# Altium PCB ifly watch_v1.PcbDoc
Units mm, origin at the board's own origin, x right, y up, seen from the top; angles counter-clockwise.
Board outline 44 x 25 mm, 2 copper layers (Top Layer, Bottom Layer); 60 components, 44 nets, 234 pads, 36 vias.
Unrouted connection lines stored in the file: 57.
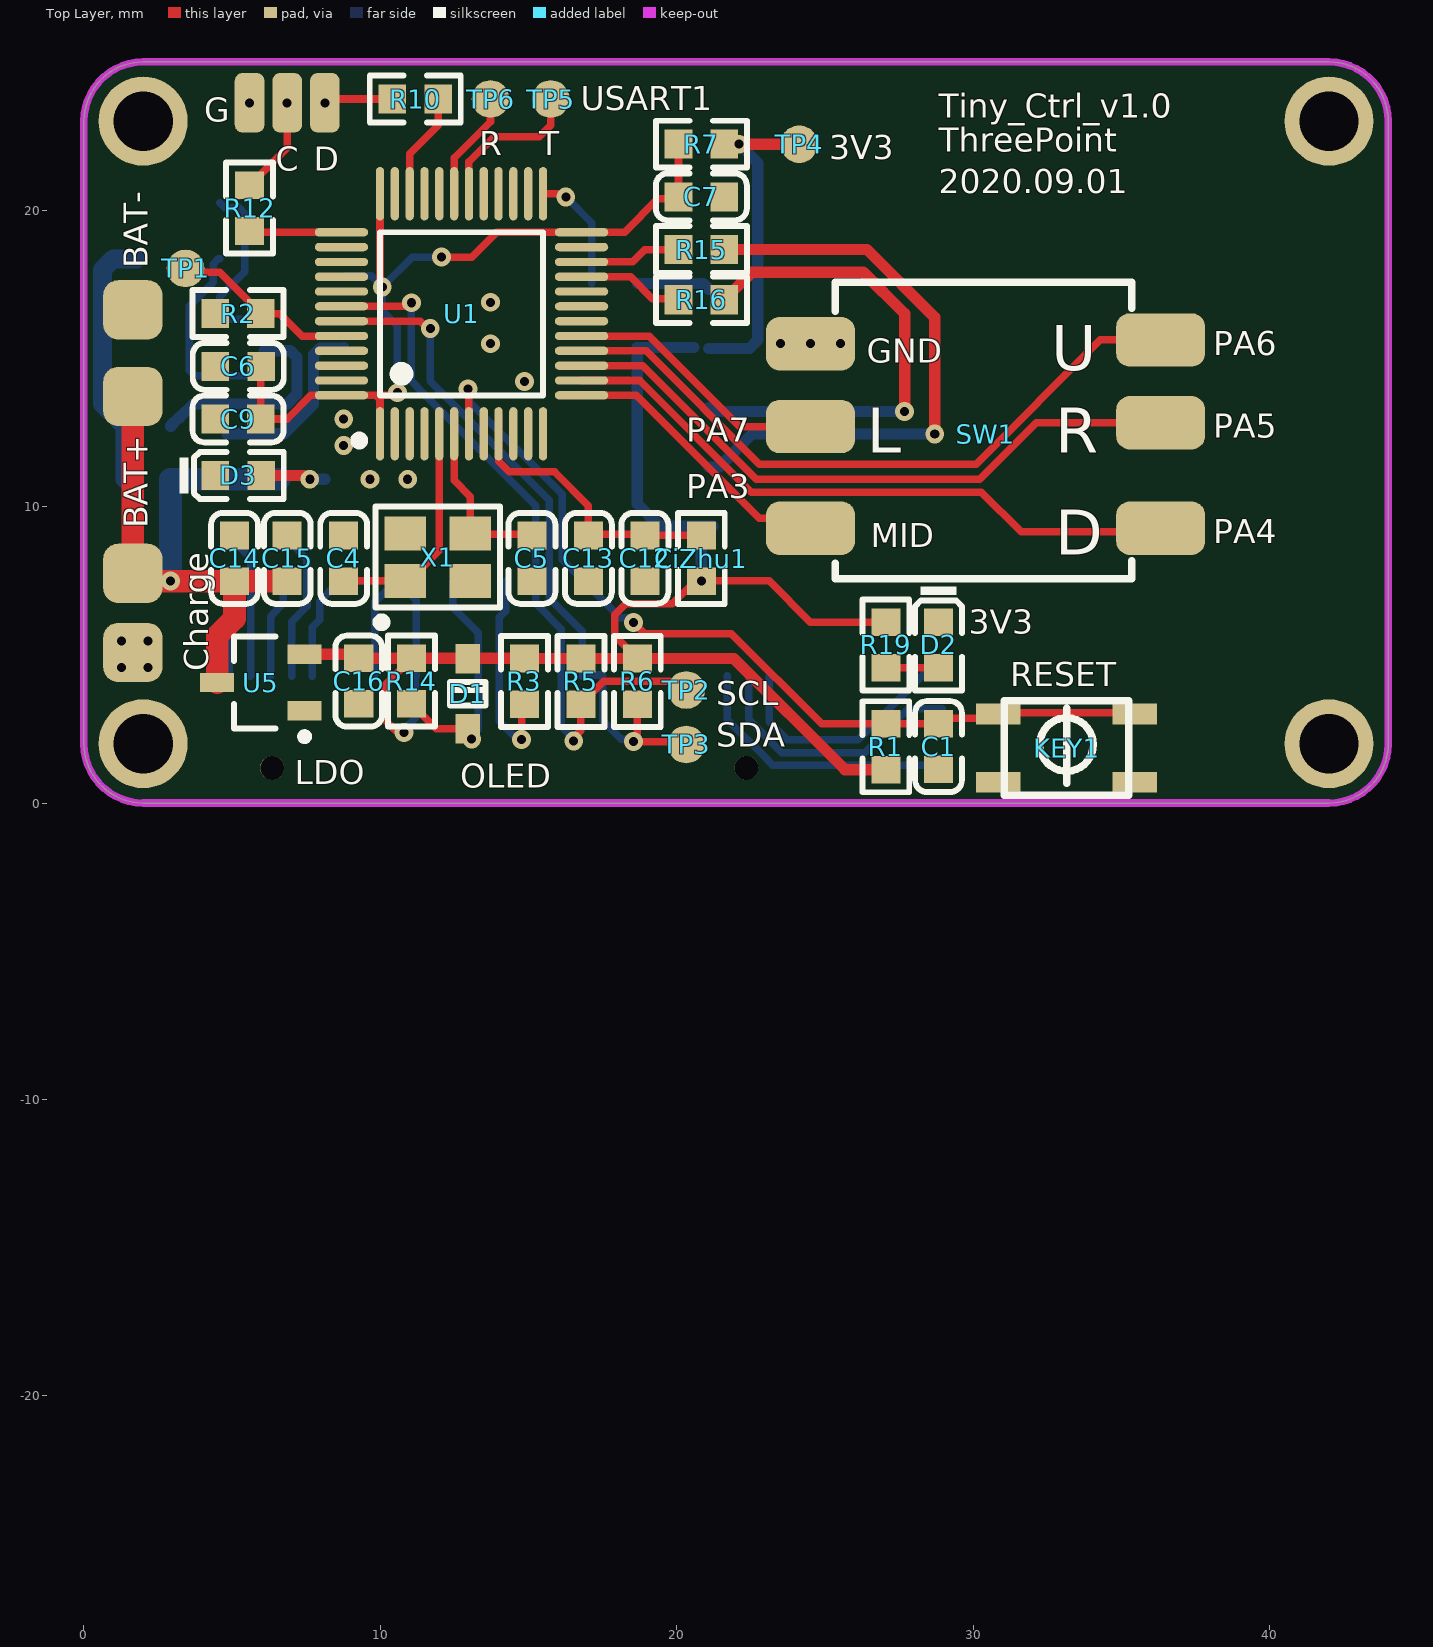
[diagram p0: Top Layer view]
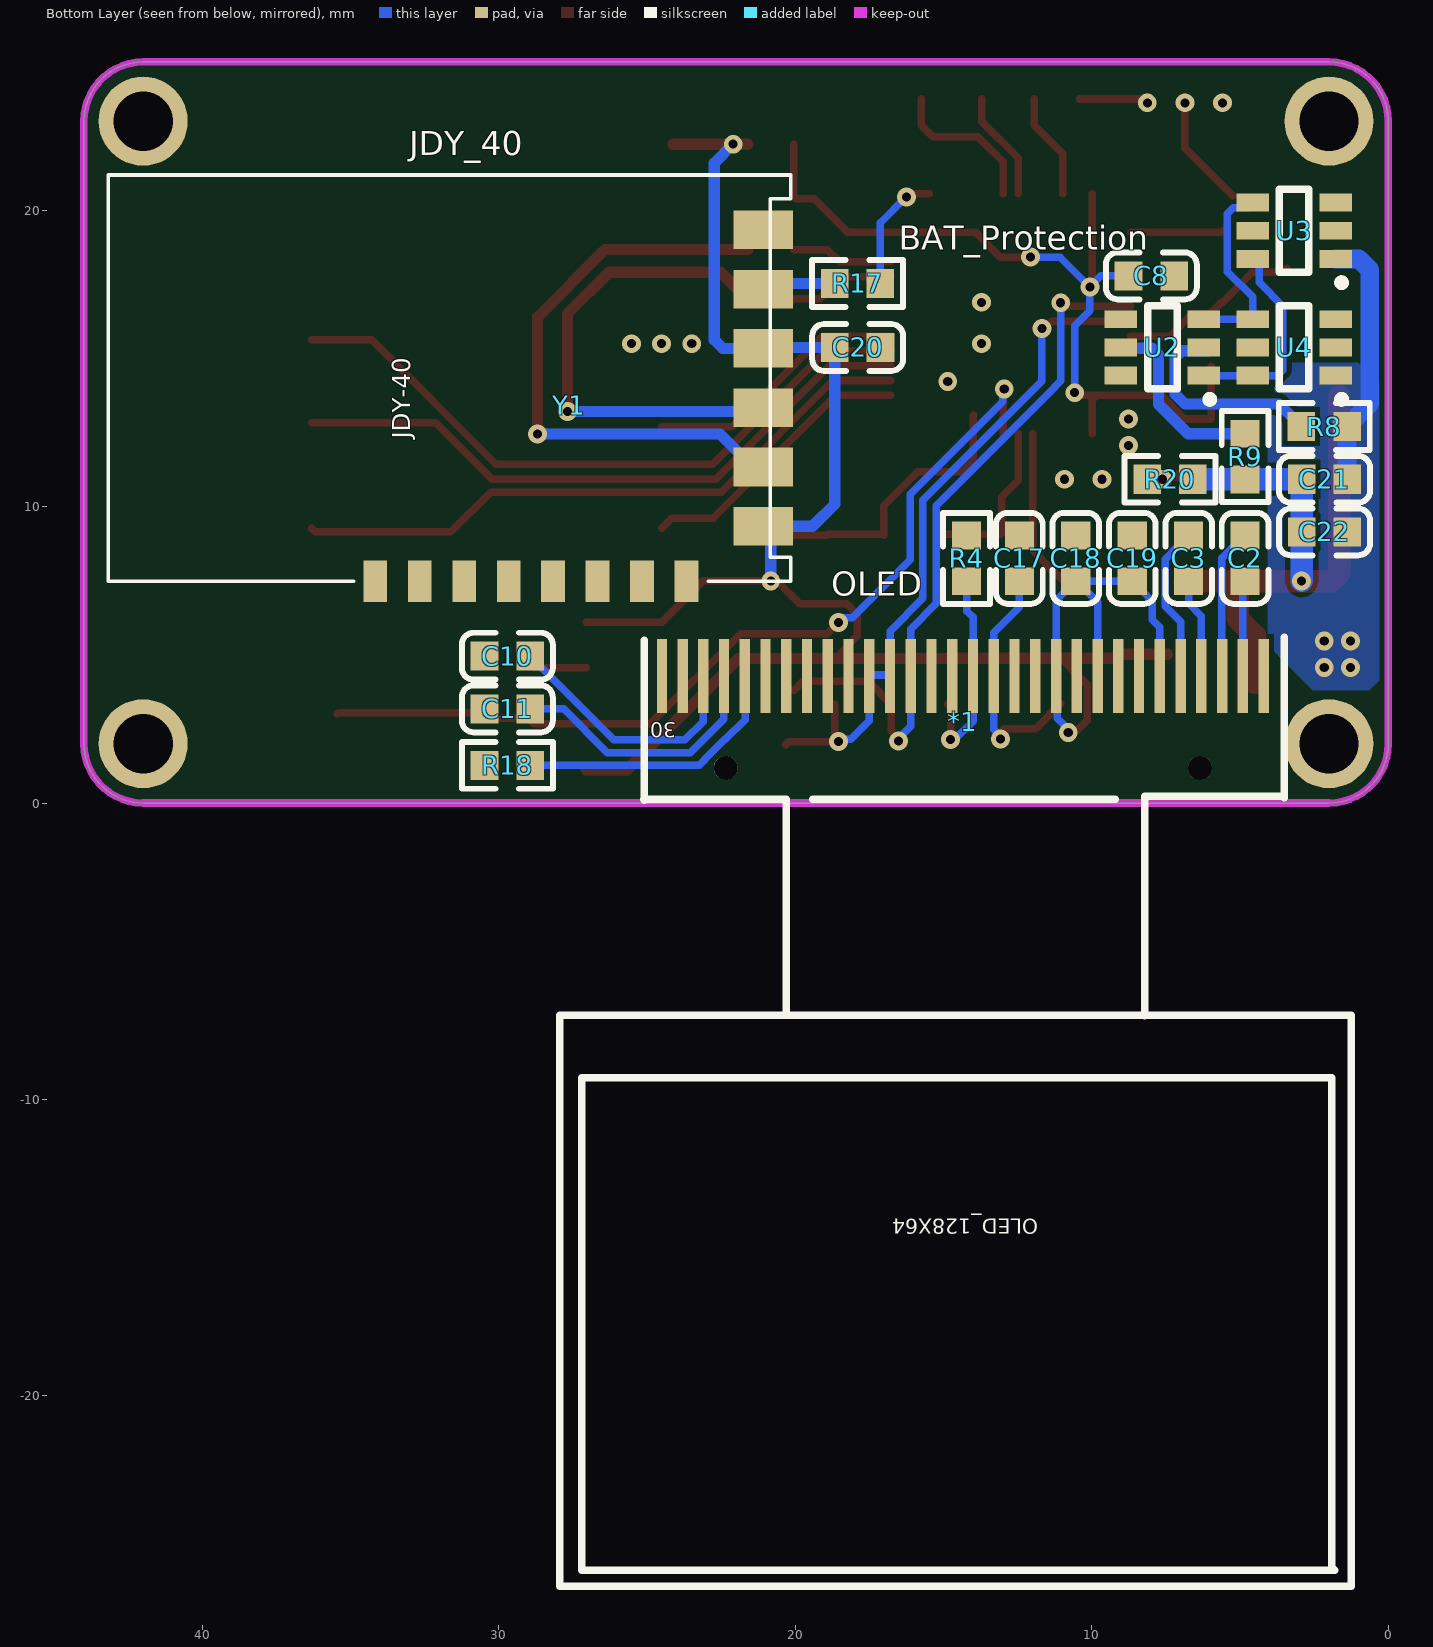
[diagram p1: Bottom Layer view, seen from below]
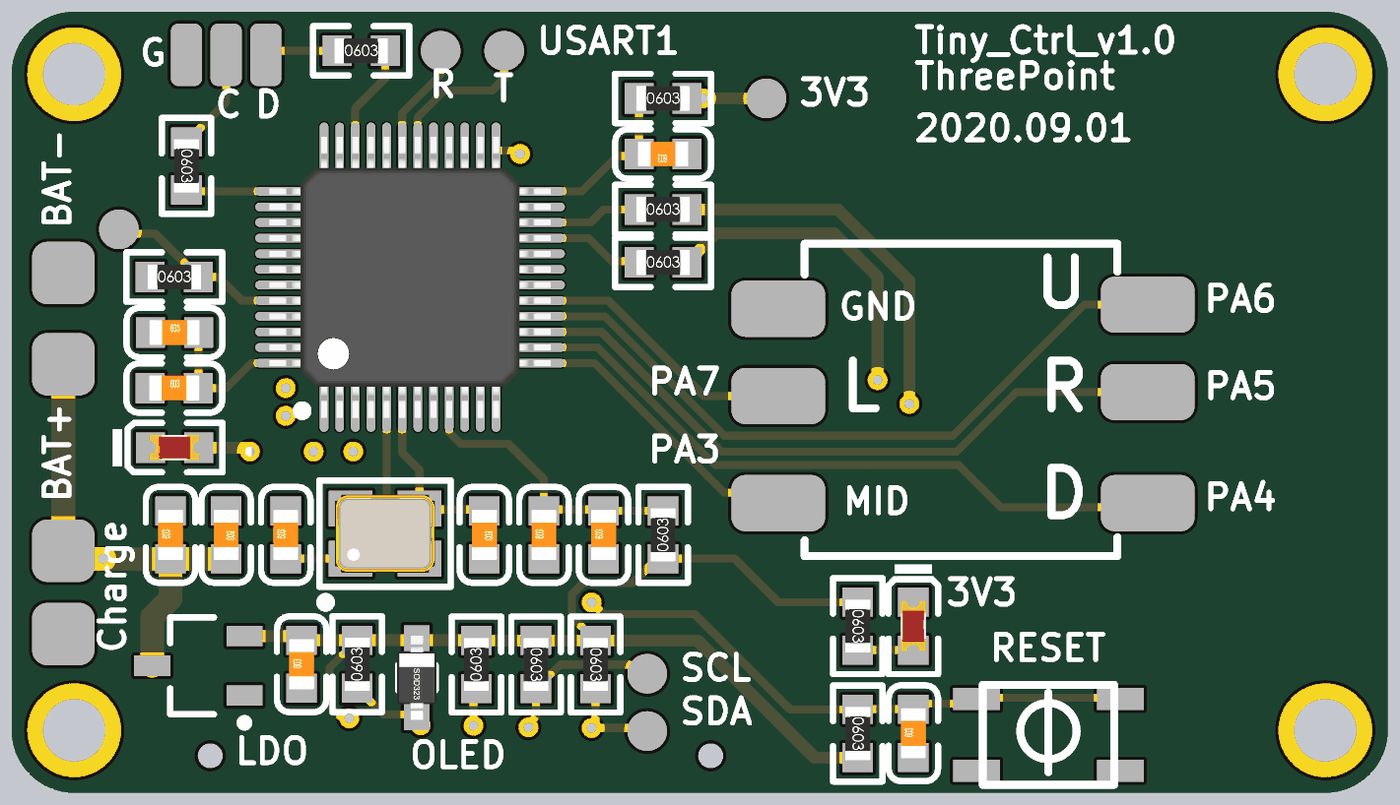
[diagram p2: 3D render of the assembled board from above, using the file's embedded part models]
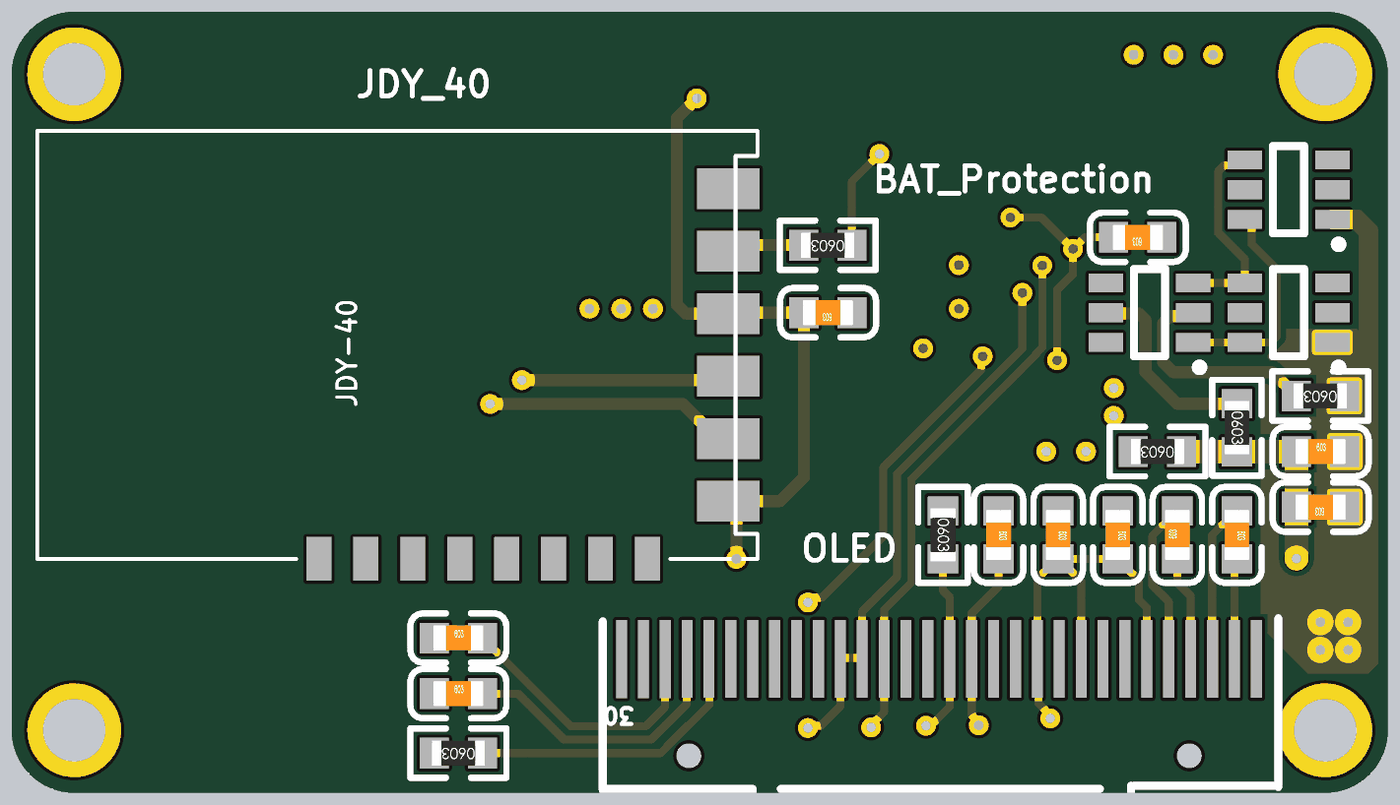
[diagram p3: 3D render of the assembled board from below, using the file's embedded part models]

## Layer stack, top to bottom
Top Solder: solder mask 0.0102, Solder Resist, Dk 3.5
Top Layer: signal copper 0.0356
Dielectric 1: dielectric 0.32, FR-4, Dk 4.8
Bottom Layer: signal copper 0.0356
Bottom Solder: solder mask 0.0102, Solder Resist, Dk 3.5

## Board outline
0,2 0,23 cw(c2,23) 2,25 42,25 cw(c42,23) 44,23 44,2 cw(c42,2) 42,0 2,0 cw(c2,2)

## Design rules (kind name [scope] priority, off if disabled: settings)
Clearance [All] p1: gap=0.178 ignorepadtopadclearanceinfootprint=TRUE
PlaneConnect [All] p1: planeconnectstyle=Direct reliefexpansion=0.508 reliefentries=4 reliefconductorwidth=0.254 reliefairgap=0.254
PolygonConnect [All] p1: connectstyle=Direct reliefconductorwidth=0.254 reliefentries=4 polygonreliefangle="90 Angle" airgapwidth=0.254
RoutingVias [All] p1: holewidth=0.305 width=0.635 viastyle="Through Hole" minholewidth=0.305 minwidth=0.508 maxholewidth=2.54 maxwidth=2.54
SolderMaskExpansion [All] p1: expansion=0.102
Width [All] p1: maxlimit=1.27 minlimit=0.254 preferedwidth=0.254
29 further rules are at their usual default settings.

## Components (designator, comment, footprint, x,y, rotation, side; value= is the part's Value field where it differs from the comment)
*1 "OLED_30Pin" OLED_0.96-30P-P0.70-12864 14.35,4.284 r0 bottom
C1 "100nF/0603/50V" LC-0603_C 28.829,1.905 r90 top
C2 "1uF/0603/50V" LC-0603_C 4.826,8.255 r270 bottom
C3 "1uF/0603/50V" LC-0603_C 6.731,8.255 r90 bottom
C4 "22pF/0603/50V" LC-0603_C 8.763,8.255 r90 top
C5 "22pF/0603/50V" LC-0603_C 15.113,8.255 r270 top
C6 "100nF/0603/50V" LC-0603_C 5.207,14.732 r0 top
C7 "100nF/0603/50V" LC-0603_C 20.828,20.447 r180 top
C8 "100nF/0603/50V" LC-0603_C 7.993,17.78 r0 bottom
C9 "100nF/0603/50V" LC-0603_C 5.199,12.954 r0 top
C10 "2.2uF/0603/16V" LC-0603_C 29.718,4.953 r180 bottom
C11 "4.7uF/0603/16V" LC-0603_C 29.718,3.175 r180 bottom
C12 "100nF/0603/50V" LC-0603_C 18.923,8.255 r90 top
C13 "1uF/0603/50V" LC-0603_C 17.018,8.255 r90 top
C14 "100nF/0603/50V" LC-0603_C 5.08,8.255 r90 top
C15 "1uF/0603/50V" LC-0603_C 6.858,8.255 r270 top
C16 "1uF/0603/50V" LC-0603_C 9.271,4.113 r90 top
C17 "10uF/0603/10V" LC-0603_C 12.446,8.255 r270 bottom
C18 "1uF/0603/50V" LC-0603_C 10.541,8.255 r270 bottom
C19 "1uF/0603/50V" LC-0603_C 8.636,8.255 r270 bottom
C20 "100nF/0603/50V" LC-0603_C 17.899,15.367 r0 bottom
C21 "100nF/0603/50V" LC-0603_C 2.151,10.922 r180 bottom
C22 "1uF/0603/50V" LC-0603_C 2.151,9.144 r0 bottom
CiZhu1 "600R/0603/5%" 0603_R 20.828,8.255 r90 top value=?
D1 "1N4148WS T4" LC-SOD-323 12.954,3.683 r270 top
D2 "红灯 0603" LC-0603_LED_S1 28.829,5.334 r270 top
D3 "红灯 0603" LC-0603_LED_S1 5.207,11.049 r0 top
KEY1 "KEY" SW_SMD_4P 33.147,1.905 r0 top
R1 "10KΩ/0603/1%" LC-0603_R 27.051,1.897 r270 top
R2 "10KΩ/0603/1%" LC-0603_R 5.199,16.51 r0 top
R3 "4.7KΩ/0603/1%" LC-0603_R 14.859,4.105 r90 top
R4 "4.7KΩ/0603/1%" LC-0603_R 14.224,8.255 r270 bottom
R5 "4.7KΩ/0603/1%" LC-0603_R 16.764,4.105 r270 top
R6 "4.7KΩ/0603/1%" LC-0603_R 18.669,4.105 r270 top
R7 "0Ω/0603/1%" LC-0603_R 20.828,22.225 r0 top
R8 "1KΩ/0603/1%" LC-0603_R 2.159,12.7 r0 bottom
R9 "100Ω/0603/1%" LC-0603_R 4.826,11.684 r270 bottom
R10 "100Ω/0603/1%" LC-0603_R 11.176,23.749 r0 top
R12 "100Ω/0603/1%" LC-0603_R 5.588,20.066 r270 top
R14 "4.7KΩ/0603/1%" LC-0603_R 11.049,4.113 r90 top
R15 "100Ω/0603/1%" LC-0603_R 20.828,18.669 r0 top
R16 "100Ω/0603/1%" LC-0603_R 20.828,16.977 r0 top
R17 "100Ω/0603/1%" LC-0603_R 17.907,17.526 r0 bottom
R18 "1MΩ/0603/1%" LC-0603_R 29.718,1.27 r0 bottom
R19 "1KΩ/0603/1%" LC-0603_R 27.051,5.334 r270 top
R20 "1KΩ/0603/1%" LC-0603_R 7.366,10.922 r0 bottom
SW1 "5P_Switch" 5Position_Switch 30.353,12.573 r270 top
TP1 "TestPoint" TestPoint 3.429,18.034 r90 top
TP2 "TestPoint" TestPoint 20.32,3.81 r90 top
TP3 "TestPoint" TestPoint 20.32,1.974 r90 top
TP4 "TestPoint" TestPoint 24.13,22.225 r90 top
TP5 "TestPoint" TestPoint 15.748,23.749 r90 top
TP6 "TestPoint" TestPoint 13.716,23.749 r90 top
U1 "STM32F103C8T6" LQFP-48_7x7x05P 12.738,16.503 r0 top
U2 "DW01KA" SOT-23-6 7.62,15.367 r180 bottom
U3 "SC8205C" SOT-23-6 3.175,19.304 r180 bottom
U4 "SC8205C" SOT-23-6 3.175,15.367 r180 bottom
U5 "SC662K-3.3V" SOT-23-3L 5.969,4.064 r0 top
X1 "无源贴片晶振" SMD-3225_4P 11.938,8.296 r0 top
Y1 "JDY-40_1" "JDY-401 -No via" 34.174,7.485 r90 bottom

## Footprints (in the part's own frame and the unit in brackets; to place one, negate y for a bottom-side part, rotate by r counter-clockwise, add the part's x,y. Pads: shape width x height; smd on the part's side, far side on the other; paste and mask are expansions set on the pad)
5Position_Switch [mm]
  rrect50% 1.8x3 smd: 1(-2.921,-5.842) 2(-0.127,-5.842) 3(3.302,-5.842) 4(3.302,5.969) 5(-0.254,5.969) 6(-3.048,5.969)
  silkscreen extent -5,-5 5,5
0603_R [mm]
  rect 0.93x0.98 smd: 1(-0.77,0) 2(0.77,0)
  silkscreen extent -1.53,-0.79 1.54,0.79, body extent -0.85,-0.4 0.85,0.4, height 0.56
"JDY-401 -No via" [mm] "串口透传"
  rect 1.4x0.8 smd: 1(0,0) 2(0,-1.5) 3(0,-3) 4(0,-4.5) 5(0,-6) 6(0,-7.5) 7(0,-9) 8(0,-10.5)
  rect 1.3x2 smd: 9(1.85,-13.092) 10(3.85,-13.092) 11(5.85,-13.092) 12(7.85,-13.092) 13(9.85,-13.092) 14(11.85,-13.092)
  silkscreen extent 0,-14.02 13.7,9.01
LC-0603_C [mm]
  rect 0.93x0.98 smd: 1(-0.77,0) 2(0.77,0)
  silkscreen extent -1.53,-0.79 1.54,0.79, body extent -0.8,-0.4 0.8,0.4, height 0.3
LC-0603_LED_S1 [mm]
  rect 0.93x0.98 smd: A(0.77,0) K(-0.77,0)
  silkscreen extent -1.98,-0.79 1.54,0.79, body extent -0.8,-0.4 0.8,0.4, height 0.6
LC-0603_R [mm]
  rect 0.93x0.98 smd: 1(-0.77,0) 2(0.77,0)
  silkscreen extent -1.53,-0.79 1.54,0.79, body extent -0.85,-0.4 0.85,0.4, height 0.56
LC-SOD-323 [mm]
  rect 1x0.83 smd: 1(1.18,0) 2(-1.18,0)
  silkscreen extent -0.4,-0.6 0.4,0.6, body extent -1.35,-0.62 1.35,0.63, height 1.1
LQFP-48_7x7x05P [mm]
  oval 0.28x1.8 smd mask+0.051: 1(-2.75,-4.05) 2(-2.25,-4.05) 3(-1.75,-4.05) 4(-1.25,-4.05) 5(-0.75,-4.05) 6(-0.25,-4.05) 7(0.25,-4.05) 8(0.75,-4.05) 9(1.25,-4.05) 10(1.75,-4.05) 11(2.25,-4.05) 12(2.75,-4.05) 25(2.75,4.05) 26(2.25,4.05) 27(1.75,4.05) 28(1.25,4.05) 29(0.75,4.05) 30(0.25,4.05) 31(-0.25,4.05) 32(-0.75,4.05) 33(-1.25,4.05) 34(-1.75,4.05) 35(-2.25,4.05) 36(-2.75,4.05)
  oval 1.8x0.28 smd mask+0.051: 13(4.05,-2.75) 14(4.05,-2.25) 15(4.05,-1.75) 16(4.05,-1.25) 17(4.05,-0.75) 18(4.05,-0.25) 19(4.05,0.25) 20(4.05,0.75) 21(4.05,1.25) 22(4.05,1.75) 23(4.05,2.25) 24(4.05,2.75) 37(-4.05,2.75) 38(-4.05,2.25) 39(-4.05,1.75) 40(-4.05,1.25) 41(-4.05,0.75) 42(-4.05,0.25) 43(-4.05,-0.25) 44(-4.05,-0.75) 45(-4.05,-1.25) 46(-4.05,-1.75) 47(-4.05,-2.25) 48(-4.05,-2.75)
  silkscreen extent -3.6,-4.42 2.75,2.75, body extent -4.5,-4.5 4.5,4.5, height 1.6
OLED_0.96-30P-P0.70-12864 [mm]
  rect 0.351x2.499 smd: 1(-10.149,-0.002) 2(-9.444,0) 3(-8.744,0) 4(-8.044,0) 5(-7.344,0) 6(-6.644,0) 7(-5.944,0) 8(-5.244,0) 9(-4.544,0) 10(-3.844,0) 11(-3.144,0) 12(-2.444,0) 13(-1.744,0) 14(-1.044,0) 15(-0.344,0) 16(0.356,0) 17(1.056,0) 18(1.756,0) 19(2.456,0) 20(3.156,0) 21(3.856,0) 22(4.556,0) 23(5.256,0) 24(5.956,0) 25(6.656,0) 26(7.356,0) 27(8.056,0) 28(8.751,0.001) 29(9.45,0.002) 30(10.149,0.002)
  round 0.8 hole 0.8 unplated: ""(-8,3.1) ""(8,3.1)
  silkscreen extent -13.1,-1.3 13.6,30.7
SMD-3225_4P [mm] "晶振"
  rect 1.4x1.15 smd: 1(-1.1,-0.8) 2(1.1,-0.8) 3(1.1,0.8) 4(-1.1,0.8)
  silkscreen extent -2.1,-2.35 2.1,1.7, body extent -1.6,-1.25 1.6,1.25, height 0.61
SOT-23-3L [mm] "http://www.aosmd.com/res/packaging_information/SOT-23-3L.pdf"
  rect 1.15x0.65 smd: 1(1.475,-0.95) 2(1.475,0.95) 3(-1.475,0)
  silkscreen extent -0.9,-1.95 1.6,1.55, body extent -0.9,-1.55 0.9,1.55, height 1.25
SOT-23-6 [mm]
  rect 1.1x0.6 smd: 1(1.4,-0.95) 2(1.4,0) 3(1.4,0.95) 4(-1.4,0.95) 5(-1.4,0) 6(-1.4,-0.95)
  silkscreen extent -0.5,-1.87 1.72,1.4
SW_SMD_4P [mm]
  rect 1.5x0.7 smd: 1(2.301,-1.201) 2(-2.298,-1.201) 3(2.301,1.099) 4(-2.298,1.099)
  silkscreen extent -2.1,-1.65 2.1,1.55
TestPoint [mm]
  round 1.27 smd: 1(0,0)

## Part data
C1 C6 C7 C8 C9 C12 C14 C20 C21: library part "0603 100nF (104) 10% 50V", "贴片电容", Package=0603, SuppliersPartNumber=C14663, ComponentLink1Description=供应商链接, ComponentLink1URL=http://www.szlcsc.com/product/details_15331.html, Supplier=LC
C2 C3 C13 C15 C16 C18 C19 C22: library part "0603 1uF (105) 10% 50V", "贴片电容", Package=0603, SuppliersPartNumber=C15849, ComponentLink1Description=供应商链接, ComponentLink1URL=http://www.szlcsc.com/product/details_16531.html, Supplier=LC
C4 C5: library part "0603 22pF (220) 5% 50V", "贴片电容", Package=0603, SuppliersPartNumber=C1653, ComponentLink1Description=供应商链接, ComponentLink1URL=http://www.szlcsc.com/product/details_2005.html, Supplier=LC
C10: library part "0603 2.2uF (225) 10% 16V", "贴片电容", Package=0603, SuppliersPartNumber=C23630, ComponentLink1Description=供应商链接, ComponentLink1URL=http://www.szlcsc.com/product/details_24366.html, Supplier=LC
C11: library part "0603 4.7uF (475) 10% 16V", "贴片电容", Package=0603, SuppliersPartNumber=C19666, ComponentLink1Description=供应商链接, ComponentLink1URL=http://www.szlcsc.com/product/details_20375.html, Supplier=LC
C17: library part "0603 10uF (106) 10% 10V", "贴片电容", Package=0603, SuppliersPartNumber=C19702, ComponentLink1Description=供应商链接, ComponentLink1URL=http://www.szlcsc.com/product/details_20411.html, Supplier=LC
CiZhu1: library part Cizhu, "电阻_磁珠"
D1: library part "SOD-323 1N4148WS T4", "二极管", Package=SOD-323, SuppliersPartNumber=C2128, ComponentLink1Description=供应商链接, ComponentLink1URL=http://www.szlcsc.com/product/details_2485.html, Supplier=LC
D2 D3: library part "0603 红灯", "发光二极管", Package=0603, SuppliersPartNumber=C2286, ComponentLink1Description=供应商链接, ComponentLink1URL=http://www.szlcsc.com/product/details_2659.html, Supplier=LC
KEY1: library part KEY_1, "开关"
R1 R2: library part "0603 10KΩ (1002) 1%", "贴片电阻", Package=0603, SuppliersPartNumber=C25804, ComponentLink1Description=供应商链接, ComponentLink1URL=http://www.szlcsc.com/product/details_26547.html, Supplier=LC
R3 R4 R5 R6 R14: library part "0603 4.7KΩ (4701) 1%", "贴片电阻", Package=0603, SuppliersPartNumber=C23162, ComponentLink1Description=供应商链接, ComponentLink1URL=http://www.szlcsc.com/product/details_23889.html, Supplier=LC
R7: library part "0603 0Ω (0R0) 1%", "贴片电阻", Package=0603, SuppliersPartNumber=C21189, ComponentLink1Description=供应商链接, ComponentLink1URL=http://www.szlcsc.com/product/details_21903.html, Supplier=LC
R8 R19 R20: library part "0603 1KΩ (1001) 1%", "贴片电阻", Package=0603, SuppliersPartNumber=C21190, ComponentLink1Description=供应商链接, ComponentLink1URL=http://www.szlcsc.com/product/details_21904.html, Supplier=LC
R9 R10 R12 R15 R16 R17: library part "0603 100Ω (1000) 1%", "贴片电阻", Package=0603, SuppliersPartNumber=C22775, ComponentLink1Description=供应商链接, ComponentLink1URL=http://www.szlcsc.com/product/details_23502.html, Supplier=LC
R18: library part "0603 1MΩ (1004) 1%", "贴片电阻", Package=0603, SuppliersPartNumber=C22935, ComponentLink1Description=供应商链接, ComponentLink1URL=http://www.szlcsc.com/product/details_23662.html, Supplier=LC
SW1: "5向开关"
U1: "ARM", Package=LQFP-48_7x7x05P, SuppliersPartNumber=C8734, ComponentLink1Description=供应商链接, ComponentLink1URL=http://www.szlcsc.com/product/details_9243.html, Supplier=LC
U2: "锂电池保护芯片"
U3 U4: "二合一MOS"
U5: "LDO"
X1: library part XTAL_4, "25M/3225"
Y1: "串口透传无过孔"

## Free pads (board coordinates)
  rrect50% 2x2 smd: 1(1.651,7.747) 1(1.651,13.716) 2(1.651,5.08) 2(1.651,16.637)
  round 3 hole 2: 3(2,2) 3(2,23) 3(42,2) 3(42,23)
  rrect50% 1x2 smd: 4(5.588,23.622) 5(6.858,23.622) 6(8.128,23.622)

## Via types
v1: diameter 0.635, hole 0.305, Top Layer to Bottom Layer, 36 vias

## Nets (pads, with @x,y where several pads share a name; then routed paths per layer and width w, separated by ;. In a path a pad name is that pad's centre, name@x,y a point inside that pad or via, vN(x,y) a via of type N, cw(c..) or ccw(c..) an arc to the next point about the centre after c; other vN are vias at no path point)
3V3: *1.6 *1.9 *1.11 C16.2 C18.2 C19.2 C20.2 CiZhu1.1 D1.2 R1.2 R3.2 R5.1 R6.1 R7.2 R14.2 R19.1 TP4.1 U5.2 Y1.9 Y1.12 | length 73.8
  Top Layer w0.254: v1(10.795,2.383) 10.722,2.455 10.499,2.455 10.16,2.794 10.16,3.994 10.686,4.52 10.686,4.545 R14.2@11.024,4.883 ; R6.1 18.644,4.875 18.306,5.213 18.306,5.238 17.907,5.637 17.907,6.35 18.272,6.715 19.849,6.715 20.619,7.485 v1(20.828,7.485) 20.836,7.493 23.114,7.493 24.503,6.104 R19.1
  Top Layer w0.381: U5.2 9.14,5.014 C16.2 11.024,4.883 R3.2@14.859,4.883 ; R3.2 R5.1 R6.1@18.644,4.875 ; R6.1 21.922,4.875 25.67,1.127 R1.2 ; R7.2 v1(22.098,22.225) TP4.1
  Bottom Layer w0.254: *1.6 7.706,5.928 7.958,6.18 7.958,6.807 8.273,7.122 8.273,7.147 8.611,7.485 C19.2 ; C19.2@8.947,7.415 9.017,7.485 C18.2@10.516,7.485 ; *1.9 9.806,6.775 C18.2@10.516,7.485 ; v1(10.795,2.383) 10.795,2.486 11.172,2.863 *1.11@11.172,4.202 ; *1.11 11.206,6.845 10.566,7.485 C18.2@10.516,7.485
  Bottom Layer w0.381: Y1.12@20.574,15.367 C20.2 18.669,10.089 19.423,9.335 Y1.9 21.209,9.335 20.828,8.954 v1(20.828,7.485) ; Y1.12 22.447,15.335 22.733,15.621 22.733,21.59 v1(22.098,22.225)
BAT+: C14.1 C15.2 C21.1 C22.2 pad.1 R9.2 R20.1 U5.3 | length 21.9
  Top Layer w0.762: pad.1@1.651,13.716 1.651,7.747 1.913,7.485 C14.1 ; U5.3 4.494,5.637 5.08,6.223 C14.1 ; C15.2 C14.1
  Bottom Layer w0.762: v1(2.921,7.493) C22.2 C21.1 R9.2@4.691,10.922 ; R9.2 4.834,10.922 R20.1
BOOT0: R2.2 TP1.1 U1.44 | length 6.2
  Top Layer w0.254: TP1.1 3.563,17.9 4.579,17.9 5.606,16.873 5.631,16.873 5.969,16.535 R2.2 6.604,16.51 7.361,15.753 U1.44
CS: R17.1 U1.25 | length 4.1
  Top Layer w0.254: U1.25 16.047,20.553 16.153,20.447 v1(16.256,20.447)
  Bottom Layer w0.254: v1(16.256,20.447) 17.137,19.566 R17.1
GND: *1.1 *1.8 *1.10 *1.12 *1.13 *1.16 *1.17 *1.21 *1.22 *1.23 *1.24 *1.25 *1.29 *1.30 C1.1 C4.2 C5.2 C6.1 C7.1 C8.1 C9.1 C10.1 C11.1 C12.1 C13.1 C14.2 C15.1 C16.1 C17.1 C18.1 C19.1 C20.1 D2.K D3.K KEY1.1 KEY1.2 pad.2@1.651,16.637 pad.4 R2.1 R4.1 R18.2 SW1.1 U1.8 U1.23 U1.35 U1.47 U2.6 U3.3 U4.3 U5.1 Y1.14
  other v1: 9.652,10.922 10.922,10.922 8.763,12.065 8.763,12.954 14.859,14.224 13.716,15.494 23.495,15.494 24.511,15.494 25.527,15.494 13.716,16.891 5.588,23.622
Net*1_2: *1.2 C2.2 | length 3.2
  Bottom Layer w0.254: C2.2 4.906,7.405 *1.2
Net*1_3: *1.3 C2.1 | length 5.2
  Bottom Layer w0.254: C2.1@4.724,9.152 5.621,8.255 5.621,4.299 *1.3
Net*1_4: *1.4 C3.1 | length 3.4
  Bottom Layer w0.254: *1.4 6.306,6.306 6.731,6.731 C3.1
Net*1_5: *1.5 C3.2 | length 5.3
  Bottom Layer w0.254: C3.2 6.756,9.025 7.094,8.687 7.094,8.662 7.526,8.23 7.526,6.637 7.006,6.117 *1.5
Net*1_15: *1.15 R3.1 R4.2 | length 7.1
  Top Layer w0.254: v1(14.766,2.146) 14.766,3.242 R3.1
  Bottom Layer w0.254: R4.2 14.224,6.477 14.006,6.259 14.006,2.758 14.618,2.146 v1(14.766,2.146)
Net*1_26: *1.26 R18.1 | length 9.4
  Bottom Layer w0.254: *1.26 21.694,4.272 21.694,2.817 22.365,2.146 22.384,2.146 23.055,1.476 23.055,1.456 23.241,1.27 R18.1
Net*1_27: *1.27 C11.2 | length 9.1
  Bottom Layer w0.254: *1.27 22.423,4.268 22.423,2.826 23.547,1.702 26.34,1.702 27.813,3.175 C11.2
Net*1_28: *1.28 C10.2 | length 8.8
  Bottom Layer w0.254: *1.28@23.114,4.282 23.114,2.745 23.726,2.134 26.129,2.134 28.585,4.59 28.61,4.59 28.948,4.928 C10.2
NetC4_1: C4.1 U1.5 X1.1 | length 7.6
  Top Layer w0.254: C4.1 8.774,7.496 10.963,7.496 11.411,7.944 11.988,8.521 U1.5
NetC5_1: C5.1 U1.6 X1.3 | length 5.6
  Top Layer w0.254: U1.6 12.488,10.88 13.038,10.33 X1.3@13.038,9.185 ; X1.3 13.068,9.066 15.072,9.066 C5.1
NetD2_A: D2.A R19.2 | length 1.8
  Top Layer w0.254: R19.2 D2.A
NetD3_A: D3.A R20.2 | length 2.2
  Top Layer w0.381: D3.A 7.424,11.049 7.551,10.922 v1(7.62,10.922)
  Bottom Layer w0.381: v1(7.62,10.922) R20.2
NetJ1_1: pad.6 R10.1 | length 2.3
  Top Layer w0.254: v1(8.128,23.622) 8.255,23.749 R10.1
NetJ1_2: pad.5 R12.1 | length 4
  Top Layer w0.254: R12.1@5.244,20.492 6.858,22.106 pad.5@6.858,23.806
  other v1: 6.858,23.622
NetR8_2: R8.2 U2.2 | length 7.2
  Bottom Layer w0.381: R8.2 2.929,12.725 3.204,13 3.229,13 3.691,13.462 6.858,13.462 7.188,13.792 7.188,15.034 6.965,15.258 U2.2@6.075,15.258
NetR9_1: R9.1 U2.5 | length 6.1
  Bottom Layer w0.381: R9.1 6.747,12.454 7.747,13.454 7.747,15.12 7.97,15.343 8.742,15.343 U2.5@8.766,15.367
NetR15_2: R15.2 Y1.10 | length 20.1
  Top Layer w0.381: R15.2 26.416,18.669 28.702,16.383 v1(28.702,12.446)
  Bottom Layer w0.381: Y1.10 21.432,11.335 22.543,12.446 v1(28.702,12.446)
NetR16_2: R16.2 Y1.11 | length 17
  Top Layer w0.381: R16.2 21.598,17.002 21.873,17.277 21.898,17.277 22.528,17.907 26.289,17.907 27.686,16.51 v1(27.686,13.208)
  Bottom Layer w0.381: Y1.11 21.209,13.208 v1(27.686,13.208)
NetR17_2: R17.2 Y1.13 | length 2.5
  Bottom Layer w0.381: R17.2 20.891,17.526 Y1.13
OC: U2.3 U3.4 U4.4 | length 6.6
  Bottom Layer w0.254: U3.4 4.748,20.081 5.235,20.081 5.43,19.886 5.43,17.928 4.575,17.073 U4.4 5.97,16.317 U2.3
OD: U2.1 U3.6 U4.6 | length 6.7
  Bottom Layer w0.254: U4.6@4.321,14.417 3.744,14.417 3.556,14.605 3.556,16.764 4.356,17.564 4.356,18.181 4.529,18.354 U3.6 ; U4.6 U2.1
PA3: SW1.3 U1.13 | length 9.6
  Top Layer w0.254: U1.13 16.793,13.748 18.637,13.748 22.779,9.606 24.176,9.606 SW1.3
PA4: SW1.4 U1.14 | length 21.7
  Top Layer w0.254: U1.14 18.743,14.253 22.505,10.49 30.277,10.49 31.623,9.144 36.195,9.144 SW1.4
PA5: SW1.5 U1.15 | length 21.9
  Top Layer w0.254: U1.15 18.853,14.753 22.684,10.922 30.226,10.922 32.131,12.827 SW1.5
PA6: SW1.6 U1.16 | length 22.9
  Top Layer w0.254: U1.16 18.964,15.253 22.787,11.43 30.099,11.43 34.29,15.621 SW1.6
PA7: SW1.2 U1.17 | length 9
  Top Layer w0.254: U1.17 19.075,15.753 22.128,12.7 SW1.2
PGND: C21.2 C22.1 pad.2@1.651,5.08 R8.1 U3.1 U4.1 | length 8.7
  Bottom Layer w0.635: C21.2 1.389,10.93 1.389,12.725 1.242,12.873 1.216,12.873 0.622,13.467 0.622,17.982 0.994,18.354 U3.1
  other v1: 1.27,4.572 2.159,4.572 1.27,5.461 2.159,5.461
RES#: *1.14 C17.2 D1.1 R14.1 | length 8.4
  Top Layer w0.254: R14.1 11.074,3.343 11.412,3.005 11.412,2.98 11.889,2.503 D1.1 13.081,2.376 v1(13.081,2.159)
  Bottom Layer w0.254: C17.2 12.446,6.604 13.306,5.744 *1.14 13.306,2.487 13.081,2.262 v1(13.081,2.159)
RESET: C1.2 KEY1.3 KEY1.4 R1.1 U1.7 | length 30.5
  Top Layer w0.254: v1(12.954,13.97) 12.988,13.936 U1.7 ; v1(18.542,6.093) 18.545,6.093 18.923,5.715 21.844,5.715 24.892,2.667 R1.1 27.059,2.675 C1.2 29.013,2.859 30.304,2.859 30.493,3.048 35.404,3.048 KEY1.3
  Bottom Layer w0.254: v1(12.954,13.97) 13.003,13.921 13.003,13.54 16.129,10.414 16.129,8.206 18.087,6.248 18.517,6.248 18.542,6.223 v1(18.542,6.093)
SCL: *1.18 R5.2 TP2.1 U1.42 | length 24.8
  Top Layer w0.254: U1.42 10.927,16.753 v1(11.049,16.875) ; v1(16.523,2.093) 16.523,2.196 16.764,2.438 R5.2 16.789,3.335 17.127,3.673 17.127,3.698 17.534,4.105 19.75,4.105 20.045,3.81 TP2.1
  Bottom Layer w0.254: v1(11.049,16.875) 11.049,14.25 11.252,14.047 11.252,14.021 15.24,10.033 15.24,6.731 16.106,5.865 16.106,2.583 16.523,2.166 v1(16.523,2.093)
SDA: *1.19 *1.20 R6.2 TP3.1 U1.43 | length 23.6
  Top Layer w0.254: U1.43 11.345,16.253 11.596,16.002 v1(11.684,16.002) ; R6.2 18.669,2.303 18.542,2.176 v1(18.542,2.073) 20.221,2.073 TP3.1
  Bottom Layer w0.254: v1(11.684,16.002) 11.684,14.224 15.697,10.211 15.697,6.909 16.806,5.8 *1.19@16.806,4.318 ; *1.19 16.84,4.318 17.472,4.318 *1.20 17.506,2.767 18.127,2.146 18.469,2.146 v1(18.542,2.073)
SWCLK: R12.2 U1.37 | length 3.1
  Top Layer w0.254: R12.2 5.631,19.253 U1.37
SWDIO: R10.2 U1.34 | length 3.6
  Top Layer w0.254: U1.34 10.988,21.91 11.946,22.868 R10.2
USART1_RX(PA10): TP6.1 U1.31 | length 3.7
  Top Layer w0.254: U1.31 12.488,21.759 13.716,22.987 TP6.1
USART1_TX(PA9): TP5.1 U1.30 | length 5.2
  Top Layer w0.254: U1.30 12.988,21.624 13.843,22.479 15.367,22.479 15.748,22.86 TP5.1
USART3_RX: R15.1 U1.22 | length 3.4
  Top Layer w0.254: U1.22 18.507,18.253 18.923,18.669 R15.1
USART3_TX: R16.1 U1.21 | length 3.6
  Top Layer w0.254: U1.21 18.442,17.753 19.177,17.018 20.017,17.018 R16.1
VDD: C6.2 C7.2 C8.2 C9.2 R7.1 U1.1 U1.24 U1.36 U1.48 | length 29.6
  Top Layer w0.254: C6.2 5.969,14.724 C9.2 6.858,12.954 7.657,13.753 U1.48 9.839,13.753 ; U1.1 9.988,13.604 9.839,13.753 ; U1.36 9.988,17.586 10.064,17.51 v1(10.064,17.407) ; v1(10.577,13.842) 10.474,13.842 10.385,13.753 9.839,13.753 ; v1(12.065,18.415) 13.081,18.415 13.919,19.253 U1.24 18.237,19.253 19.361,20.377 19.988,20.377 C7.2 R7.1
  Bottom Layer w0.254: C8.2 9.691,17.78 v1(10.064,17.407) ; v1(10.577,13.842) 10.577,16.093 10.064,16.606 v1(10.064,17.407) ; v1(12.065,18.415) 11.072,18.415 v1(10.064,17.407)
VDDA: C12.2 C13.2 CiZhu1.2 U1.9 | length 10.1
  Top Layer w0.254: U1.9@13.988,13.088 13.993,13.083 13.993,11.534 14.351,11.176 15.875,11.176 17.018,10.033 C13.2 17.059,9.066 18.882,9.066 C12.2 CiZhu1.2
pads on no net: *1. *1.7 U1.2 U1.3 U1.4 U1.10 U1.11 U1.12 U1.18 U1.19 U1.20 U1.26 U1.27 U1.28 U1.29 U1.32 U1.33 U1.38 U1.39 U1.40 U1.41 U1.45 U1.46 U2.4 U3.2 U3.5 U4.2 U4.5 X1.2 X1.4 Y1.1 Y1.2 Y1.3 Y1.4 Y1.5 Y1.6 Y1.7 Y1.8

## Polygon pours and split planes (outlines as drawn)
PGND on Bottom Layer "c" (solid, remove dead copper, pour order 0): 1.016,14.859 0.254,14.097 0.254,4.191 0.635,3.81 2.54,3.81 4.064,5.334 4.064,14.097 3.302,14.859

## Keep-outs
Keep-Out Layer:
  the board outline again, w0.254

## Silkscreen, mask and mechanical layers (free items; w line width, h text height)
Top Overlay:
  text "USART1" at 16.764,23.368 h0.81
  text "Tiny_Ctrl_v1.0" at 28.829,23.114 h0.81
  text "G" at 4.064,22.987 h0.81
  text "ThreePoint" at 28.829,21.971 h0.81
  text "R" at 13.335,21.844 h0.81
  text "T" at 15.367,21.844 h0.81
  text "3V3" at 25.146,21.717 h0.81
  text "C" at 6.477,21.336 h0.81
  text "D" at 7.747,21.336 h0.81
  text "2020.09.01" at 28.829,20.574 h0.81
  text "BAT-" at 2.159,18.034 h0.81 r90
  text "PA6" at 38.1,15.113 h0.81
  text "GND" at 26.416,14.859 h0.81
  text "PA5" at 38.1,12.319 h0.81
  text "PA7" at 20.32,12.192 h0.81
  text "PA3" at 20.32,10.287 h0.81
  text "BAT+" at 2.159,9.271 h0.81 r90
  text "PA4" at 38.1,8.763 h0.81
  text "MID" at 26.543,8.636 h0.81
  text "3V3" at 29.845,5.715 h0.81
  text "Charge" at 4.191,4.445 h0.81 r90
  text "RESET" at 31.242,3.937 h0.81
  text "SCL" at 21.336,3.302 h0.81
  text "SDA" at 21.336,1.905 h0.81
  text "LDO" at 7.112,0.635 h0.81
  text "OLED" at 12.7,0.508 h0.81
Bottom Overlay:
  text "JDY_40" at 33.02,21.844 h0.81
  text "BAT_Protection" at 16.51,18.669 h0.81
  text "OLED" at 18.796,6.985 h0.81
Mechanical 1:
  the board outline again, w0.254

## Text inside footprints (layer, text, board x,y; h text height)
*1: Bottom Overlay "OLED_128X64" at 11.809,-14.029 h0.51 r180; Bottom Overlay "30" at 24.016,2.723 h0.51 r180
SW1: Top Overlay "U" at 32.639,14.605 h1.52; Top Overlay "D" at 32.766,8.382 h1.52; Top Overlay "R" at 32.766,11.811 h1.52; Top Overlay "L" at 26.416,11.811 h1.52
Y1: Bottom Overlay "JDY-40" at 32.995,12.286 h0.6 r270